# EAGLE board Qwiic_MultiStar_pattern (EAGLE 9.6.2)
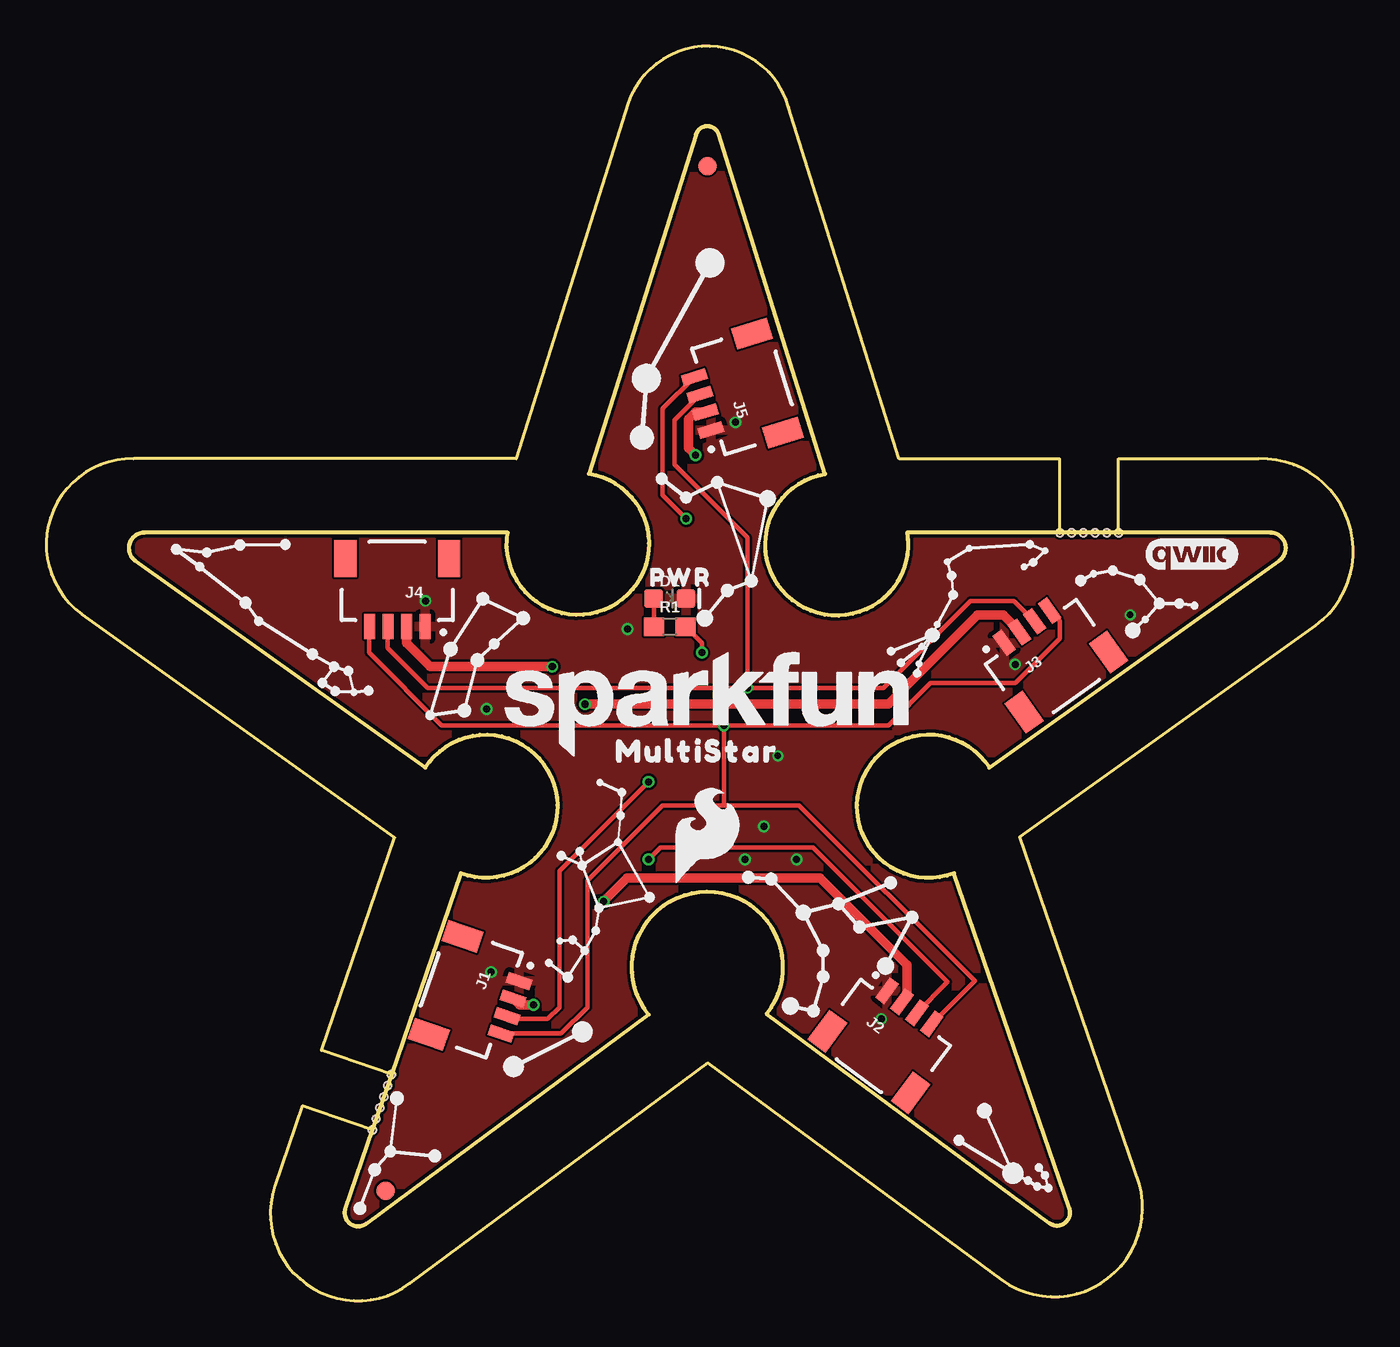
[diagram p0: board, top side]
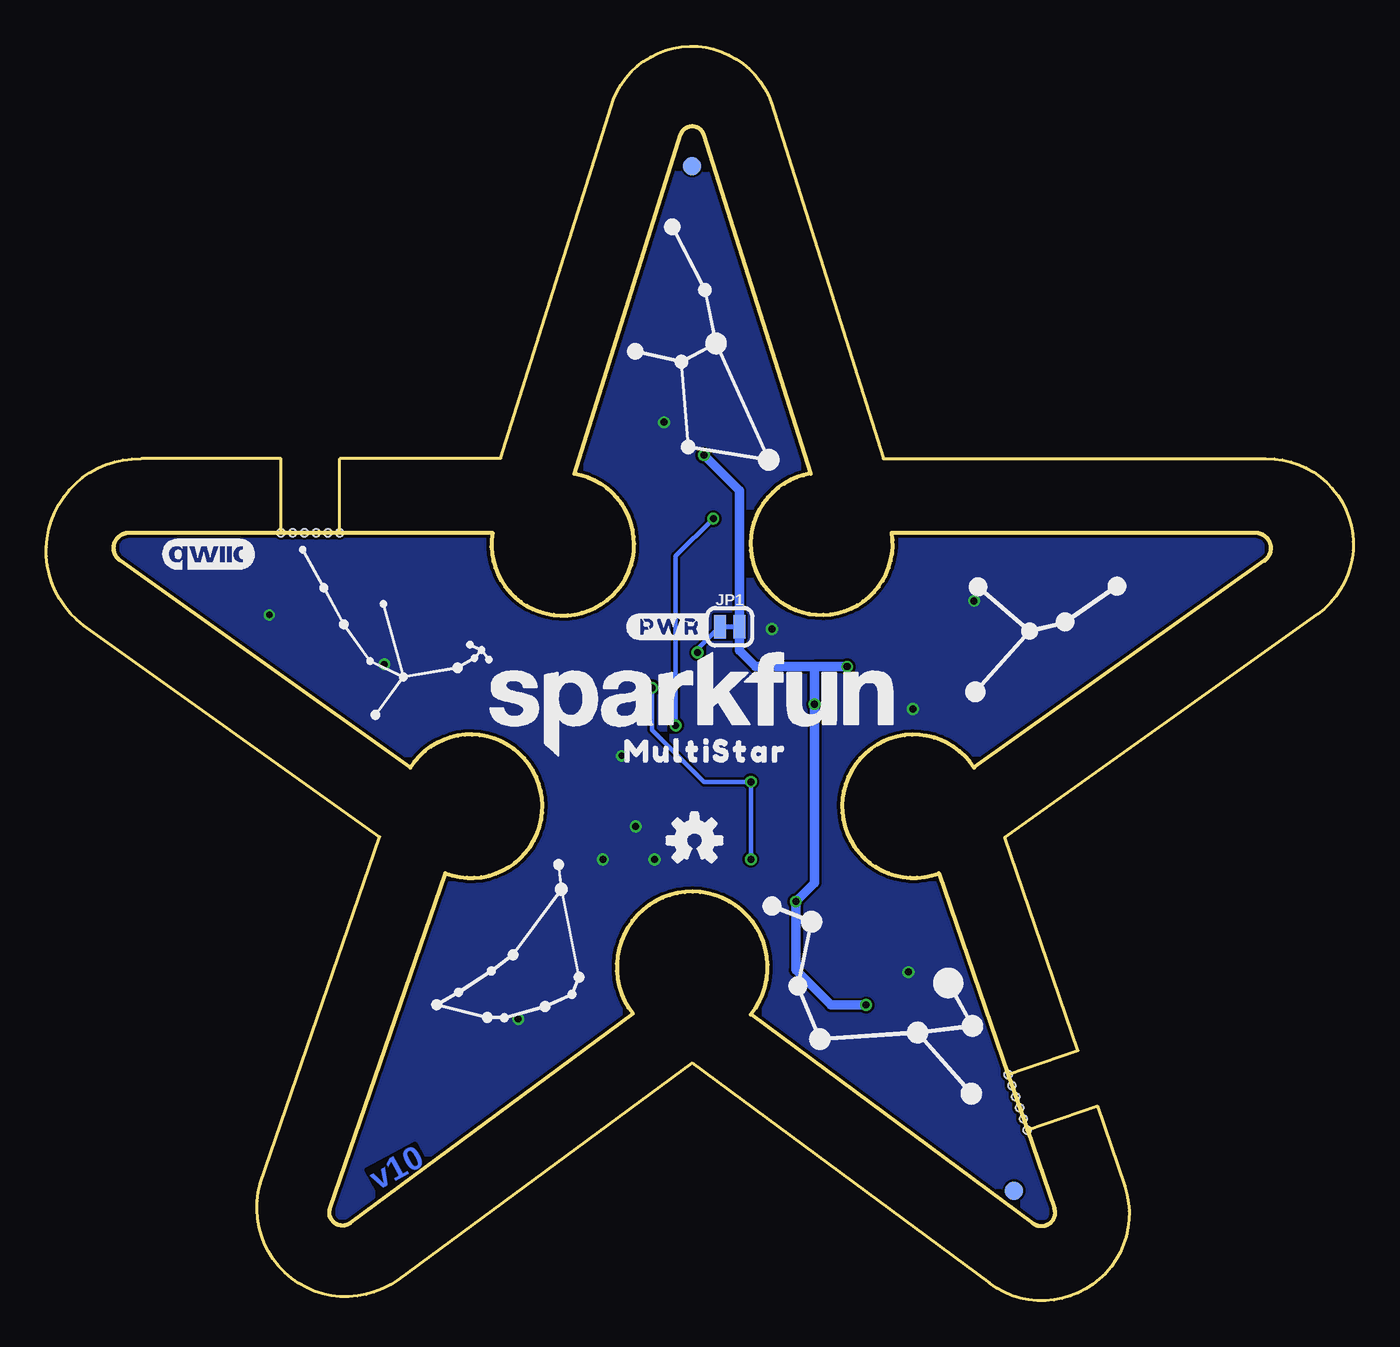
[diagram p1: board, bottom side, seen from below]

Size 70.64 x 67.8 mm. Coordinates in mm from the lower left corner, seen from the top.
Outline: 18.65,12.23 22.4,23.1 arc258 20.49,28.81 4.81,40 arc-144 5.29,41.51 24.94,41.51 arc270 29.34,44.7 35.11,63.03 arc-145 36.35,63.03 42.1,44.69 arc270 46.53,41.51 54.78,41.51
Outline: 18.65,12.23 17.62,9.22
Outline: 17.62,9.22 16.16,4.99 arc145 17.29,4.17 32.56,15.47 arc-257 38.93,15.51 54.2,4.21 arc145 55.3,4.99 49.07,23.1 arc-258 50.96,28.82 66.65,40.01 arc144 66.17,41.51 57.96,41.51
Outline: 57.96,41.51 54.78,41.51
Outline: 54.78,41.51 54.78,45.51 46.08,45.53 40.13,64.51 arc145 31.46,64.73 25.4,45.51 4.71,45.51 arc145 1.91,37.12 18.84,25.04 14.87,13.53 18.65,12.23
Outline: 57.96,41.51 57.96,45.51 65.52,45.51 arc-145 68.62,36.5 52.62,25.07 59.08,6.31 arc-142 51.64,1.13 35.75,12.85 19.65,0.93 arc-145 12.35,6.2 13.84,10.53 17.62,9.22
Copper layers (1*16): Top 0.035mm / dielectric 1.5mm / Bottom 0.035mm
Design rules "SparkFun-2-Layer-Minimum-JLCPCB": minimum track width 5mil, minimum drill 0.3mm, track to track 5mil, track to pad 5mil, pad to pad 5mil, via to via 5mil, smd to smd 5mil, copper to edge 7mil, drill to drill 7mil, minimum pad ring 5mil, minimum via ring 5mil, stop-mask expansion 2.5mil, vias tented up to drill 25mil, thermal gap 10mil
Holes 0.4 mm at 54.78,41.51 55.42,41.51 56.05,41.51 56.69,41.51 57.32,41.51 57.96,41.51 17.62,9.22 17.83,9.82 18.03,10.42 18.24,11.03 18.45,11.63 18.65,12.23

## Footprints (pad centres in the part's own frame; a part is rotated, then mirrored left to right if it is on the bottom)
LED-0603 = smd 1 x 1: A -0.877,0; C 0.877,0
FIDUCIAL-1X2 = smd 1 x 1: 1 0,0
JST04_1MM_RA = smd 0.6 x 1.35: 1 -1.5,0; 2 -0.5,0; 3 0.5,0; 4 1.5,0 | smd 1.2 x 2: NC1 2.8,-3.675; NC2 -2.8,-3.675
SMT-JUMPER_2_NC_TRACE_SILK = smd 0.66 x 1.27: 1 -0.521,0; 2 0.521,0
0603 = smd 1.1 x 1: 1 -0.85,0; 2 0.85,0

## Placement (x,y rotation side)
D1  RED  [LED-0603]  33.7,37.95 0 top
FD1  FIDUCIAL1X2  [FIDUCIAL-1X2]  18.33,5.95 0 top
FD2  FIDUCIAL1X2  [FIDUCIAL-1X2]  18.33,5.95 0 bottom
FD3  FIDUCIAL1X2  [FIDUCIAL-1X2]  35.73,61.32 0 top
FD4  FIDUCIAL1X2  [FIDUCIAL-1X2]  35.73,61.32 0 bottom
J1  QWIIC_RIGHT_ANGLE  [JST04_1MM_RA]  25.06,15.86 251 top
J2  QWIIC_RIGHT_ANGLE  [JST04_1MM_RA]  46.65,15.86 323.5 top
J3  QWIIC_RIGHT_ANGLE  [JST04_1MM_RA]  53,36.43 35.5 top
J4  QWIIC_RIGHT_ANGLE  [JST04_1MM_RA]  18.97,36.43 180 top
J5  QWIIC_RIGHT_ANGLE  [JST04_1MM_RA]  35.48,48.5 107.4 top
JP1  PWR_LED  [SMT-JUMPER_2_NC_TRACE_SILK]  33.7,36.43 0 bottom
LOGO1  QWIIC_LOGO_5MM  [QWIIC_5MM]  61.89,40.37 0 bottom
LOGO2  QWIIC_LOGO_5MM  [QWIIC_5MM]  61.89,40.37 0 top
LOGO3  OSHW-LOGOS  [OSHW-LOGO-S]  35.6,24.87 0 bottom
LOGO4  SFE_LOGO_NAME.2_INCH  [SFE_LOGO_NAME_.2]  35.73,32.24 0 bottom
LOGO5  SFE_LOGO_NAME.2_INCH  [SFE_LOGO_NAME_.2]  35.73,32.24 0 top
R1  1k  [0603]  33.7,36.43 0 top
U$2  [SFE_LOGO_FLAME_.2]  35.73,25.13 0 top
U$3  [MULTISTAR0]  29.89,29.7 0 top
U$5  [MULTISTAR0]  40.3,29.7 0 bottom
U$6  [#PWR#0]  39.29,36.43 0 bottom
U$9  [PWR0]  31.92,39.1 0 top

## Library data of the parts
D1 = SparkFun-LED; PROD_ID: DIO-00819
FD1-FD4 LOGO1-LOGO5 U$2 = SparkFun-Aesthetics
J1-J5 = SparkFun-Connectors; PROD_ID: CONN-13694
JP1 = SparkFun-Jumpers
R1 = SparkFun-Resistors; PROD_ID: RES-07856
U$3 U$5 U$6 U$9 = output

## Nets
3.3V: J1.2 J2.2 J3.2 J4.2 J5.2 JP1.2
GND: D1.C J1.1 J2.1 J3.1 J4.1 J5.1
N$1: D1.A R1.1
N$2: JP1.1 R1.2
SCL: J1.4 J2.4 J3.4 J4.4 J5.4
SDA: J1.3 J2.3 J3.3 J4.3 J5.3

## Tracks (layer width: path | path; a pad name or v marks a point on that pad's centre or on a via)
3.3V  (via drill 0.38)
  Top 0.508: v29.12,32.24 45.51,32.24 50.34,37.07 51.73,37.07 52.6,36.2 J3.2 | v27.35,34.27 20.75,34.27 19.47,35.55 J4.2 | v35.1,45.7 34.72,46.08 34.72,47.64 35.09,48.02 J5.2 | v30.13,21.57 31.4,22.84 41.83,22.84 46.51,18.16 46.51,16.41 J2.2 | v26.33,15.98 25.57,15.98 J1.2
  Bottom 0.508: v26.33,15.98 28.24,15.98 30.13,17.88 v30.13,21.57 29.12,22.59 v29.12,32.24 29.12,34.27 | v35.1,45.7 33.18,43.78 JP1.2 33.18,35.15 32.3,34.27 29.12,34.27 | v27.35,34.27 29.12,34.27
GND  (via drill 0.35, 0.38)
  other vias: 20.49,37.83 31.41,36.3 37.26,47.48 52.37,34.4 45.13,15.22 24.05,17.76 58.59,37.07 39.54,29.45 38.78,25.64 23.79,31.99 37.76,23.86 40.56,23.86
  pour Top: 3.98,2.78 68.75,2.78 68.75,65.01 3.98,65.01
  pour Bottom: 3.98,2.78 68.75,2.78 68.75,65.01 3.98,65.01
N$1
  Top 0.254: D1.A 32.85,37.93 R1.1
N$2  (via drill 0.38)
  Top 0.254: R1.2 35.44,35.54 v35.44,35.03
  Bottom 0.254: JP1.1 35.44,35.21 v35.44,35.03
SCL  (via drill 0.38)
  Top 0.254: v36.62,31.1 45.51,31.1 47.8,33.38 52.37,33.38 54.78,35.8 54.78,36.74 J3.4 | 36.62,26.78 v36.62,31.1 | 36.62,26.78 40.68,26.78 50.18,17.28 J2.4 | 36.62,26.78 33.32,26.78 29.25,22.71 29.25,15.86 27.84,14.44 J1.4 | v34.59,42.27 33.32,43.54 33.32,48.22 J5.4 | v36.62,31.1 21.38,31.1 17.44,35.03 17.44,36.41 J4.4
  Bottom 0.254: v34.59,42.27 36.62,40.24 v36.62,31.1
SDA  (via drill 0.38)
  Top 0.254: v37.89,33.13 45.26,33.13 49.96,37.83 52.3,37.83 J3.3 | v32.56,28.05 27.73,23.22 27.73,15.86 27.1,15.22 25.06,15.22 J1.3 | v32.56,23.86 33.19,24.49 41.45,24.49 48.72,17.22 J2.3 | v37.89,33.13 37.89,41.26 33.95,45.19 33.95,47.6 J5.3 | v37.89,33.13 20.62,33.13 18.46,35.29 J4.3
  Bottom 0.254: v37.89,33.13 37.89,30.84 35.1,28.05 v32.56,28.05 v32.56,23.86

## Text on the board
Bottom: v10